# EAGLE board SOIC_TSSOP-16 (EAGLE 7.3.0)
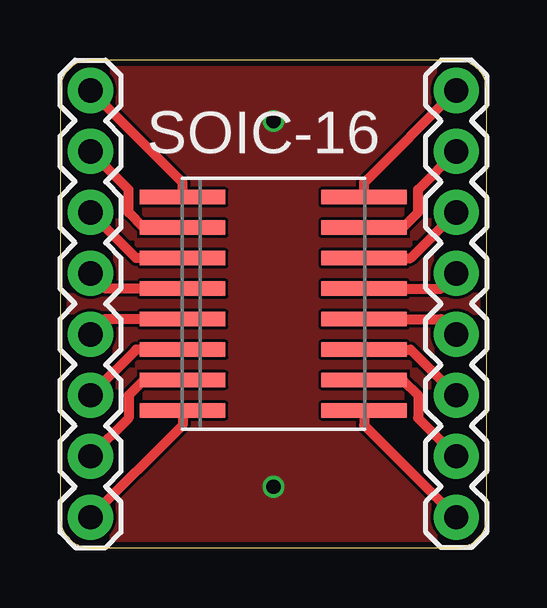
[diagram p0: board, top side]
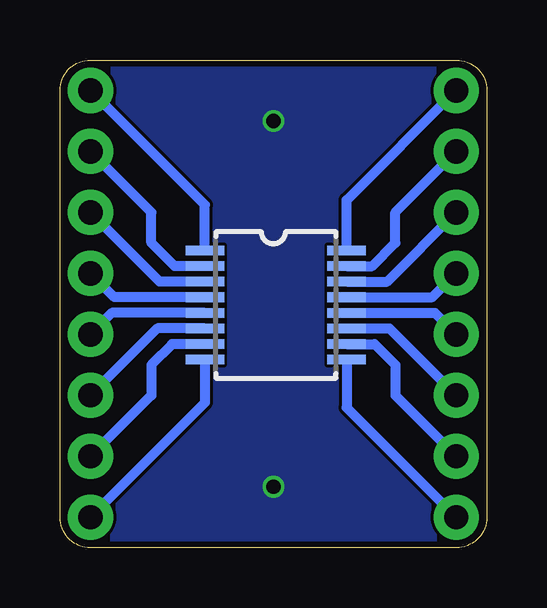
[diagram p1: board, bottom side, seen from below]

Size 17.78 x 20.32 mm. Coordinates in mm from the lower left corner, seen from the top.
Outline: 16.51,20.32 1.27,20.32 arc90 0,19.05 0,1.27 arc90 1.27,0 16.51,0 arc90 17.78,1.27 17.78,19.05 arc90 16.51,20.32
Copper layers (1*16): Top 0.035mm / dielectric 1.5mm / Bottom 0.035mm
Design rules "dirt_cheap_dirty_boards.v1": minimum track width 5mil, minimum drill 12mil, track to track 5mil, track to pad 5mil, pad to pad 5mil, via to via 5mil, smd to smd 0mil, copper to edge 10mil, drill to drill 10mil, minimum pad ring 10mil, minimum via ring 6mil, stop-mask expansion 2mil, vias tented up to drill 25mil, thermal gap 10mil

## Footprints (pad centres in the part's own frame; a part is rotated, then mirrored left to right if it is on the bottom)
1X08_ROUND = drill 1.016 pad 1.88: 1 0,0; 2 2.54,0; 3 5.08,0; 4 7.62,0; 5 10.16,0; 6 12.7,0; 7 15.24,0; 8 17.78,0
SOIC-16NW = smd 0.6 x 3.56: P1 -4.445,-3.78; P2 -3.175,-3.78; P3 -1.905,-3.78; P4 -0.635,-3.78; P5 0.635,-3.78; P6 1.905,-3.78; P7 3.175,-3.78; P8 4.445,-3.78; P9 4.445,3.78; P10 3.175,3.78; P11 1.905,3.78; P12 0.635,3.78; P13 -0.635,3.78; P14 -1.905,3.78; P15 -3.175,3.78; P16 -4.445,3.78
TSSOP16 = smd 0.4 x 1.6: 1 -2.225,-2.85; 2 -1.575,-2.85; 3 -0.925,-2.85; 4 -0.275,-2.85; 5 0.375,-2.85; 6 1.025,-2.85; 7 1.675,-2.85; 8 2.325,-2.85; 9 2.325,3.05; 10 1.675,3.05; 11 1.025,3.05; 12 0.375,3.05; 13 -0.275,3.05; 14 -0.925,3.05; 15 -1.575,3.05; 16 -2.225,3.05

## Placement (x,y rotation side)
JP1  [1X08_ROUND]  1.27,1.27 90 top
JP2  [1X08_ROUND]  16.51,19.05 270 top
SOIC-16  SOIC-16  [SOIC-16NW]  8.89,10.16 270 top
U$2  TSSOP-16  [TSSOP16]  8.89,10.16 270 bottom

## Library data of the parts
JP1 JP2 = SparkFun-Connectors
SOIC-16 = dp_devices
U$2 = Kevin-GenericICFootprints

## Nets
1: JP1.8 SOIC-16.P1 U$2.16
2: JP1.7 SOIC-16.P2 U$2.15
3: JP1.6 SOIC-16.P3 U$2.14
4: JP1.5 SOIC-16.P4 U$2.13
5: JP1.4 SOIC-16.P5 U$2.12
6: JP1.3 SOIC-16.P6 U$2.11
7: JP1.2 SOIC-16.P7 U$2.10
8: JP1.1 SOIC-16.P8 U$2.9
9: JP2.8 SOIC-16.P9 U$2.8
10: JP2.7 SOIC-16.P10 U$2.7
11: JP2.6 SOIC-16.P11 U$2.6
12: JP2.5 SOIC-16.P12 U$2.5
13: JP2.4 SOIC-16.P13 U$2.4
14: JP2.3 SOIC-16.P14 U$2.3
15: JP2.2 SOIC-16.P15 U$2.2
16: JP2.1 SOIC-16.P16 U$2.1

## Tracks (layer width: path | path; a pad name or v marks a point on that pad's centre or on a via)
1
  Top 0.406: SOIC-16.P1 5.11,15.21 JP1.8
  Bottom 0.406: U$2.16 5.84,14.48 JP1.8
2
  Top 0.406: SOIC-16.P2 3.49,13.34 2.86,13.97 2.86,14.92 JP1.7
  Bottom 0.406: U$2.15 4.78,11.73 3.81,12.7 3.81,13.97 JP1.7
3
  Top 0.406: SOIC-16.P3 3.17,12.06 JP1.6
  Bottom 0.406: U$2.14 4.16,11.09 JP1.6
4
  Top 0.406: SOIC-16.P4 1.91,10.79 JP1.5
  Bottom 0.406: U$2.13 2.27,10.44 JP1.5
5
  Top 0.406: SOIC-16.P5 1.91,9.53 JP1.4
  Bottom 0.406: U$2.12 2.17,9.79 JP1.4
6
  Top 0.406: SOIC-16.P6 3.17,8.26 JP1.3
  Bottom 0.406: U$2.11 4.05,9.13 JP1.3
7
  Top 0.406: SOIC-16.P7 3.49,6.99 2.86,6.35 2.86,5.4 JP1.2
  Bottom 0.406: U$2.10 4.67,8.48 3.81,7.62 3.81,6.35 JP1.2
8
  Top 0.406: SOIC-16.P8 5.11,5.11 JP1.1
  Bottom 0.406: U$2.9 5.84,5.84 JP1.1
9
  Top 0.406: SOIC-16.P9 12.67,5.11 JP2.8
  Bottom 0.406: U$2.8 11.74,6.04 JP2.8
10
  Top 0.406: SOIC-16.P10 14.29,6.99 14.92,6.35 14.92,5.4 JP2.7
  Bottom 0.406: U$2.7 13.11,8.48 13.97,7.62 13.97,6.35 JP2.7
11
  Top 0.406: SOIC-16.P11 14.61,8.26 JP2.6
  Bottom 0.406: U$2.6 13.72,9.13 JP2.6
12
  Top 0.406: SOIC-16.P12 15.88,9.53 JP2.5
  Bottom 0.406: U$2.5 15.62,9.79 JP2.5
13
  Top 0.406: SOIC-16.P13 15.88,10.79 JP2.4
  Bottom 0.406: U$2.4 15.52,10.44 JP2.4
14
  Top 0.406: SOIC-16.P14 14.61,12.06 JP2.3
  Bottom 0.406: U$2.3 13.62,11.09 JP2.3
15
  Top 0.406: SOIC-16.P15 14.29,13.34 14.92,13.97 14.92,14.92 JP2.2
  Bottom 0.406: U$2.2 13.01,11.73 13.97,12.7 13.97,13.97 JP2.2
16
  Top 0.406: SOIC-16.P16 12.67,15.21 JP2.1
  Bottom 0.406: U$2.1 11.74,14.28 JP2.1
GND  (via drill 0.6)
  other vias: 8.89,17.78 8.89,2.54
  pour Top: 0,20.32 17.78,20.32 17.78,0 0,0
  pour Bottom: 0,20.32 17.78,20.32 17.78,0 0,0